# Altium PCB JTAG_USB.PcbDoc (part 1 of 2)
Units mil, origin at the board's own origin, x right, y up, seen from the top; angles counter-clockwise.
Board outline 1370 x 2285 mil, 4 copper layers (Top Layer, Int1 (GND), Int2 (PWR), Bottom Layer), stack 62.468 mil thick; 60 components, 42 nets, 234 pads, 167 vias.
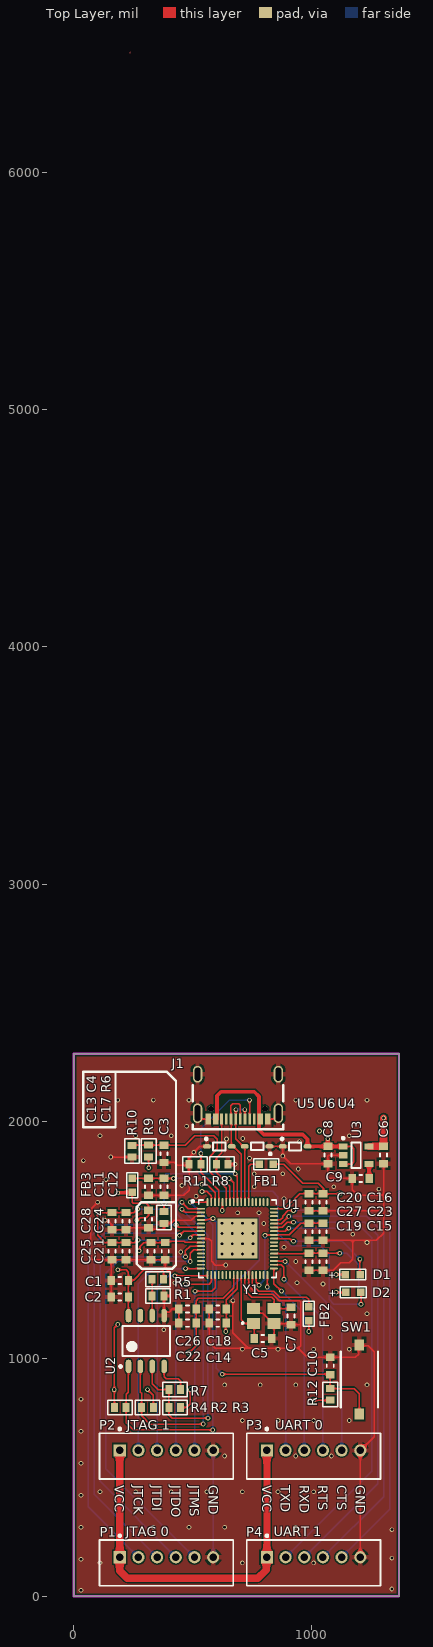
[diagram p0: Top Layer view]
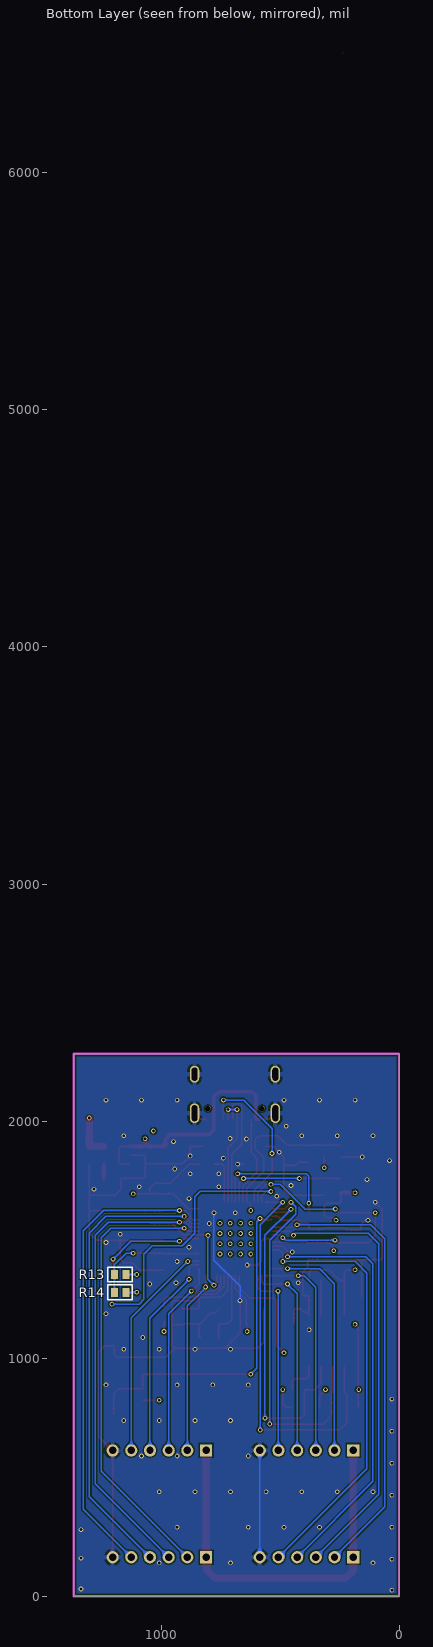
[diagram p1: Bottom Layer view, seen from below]
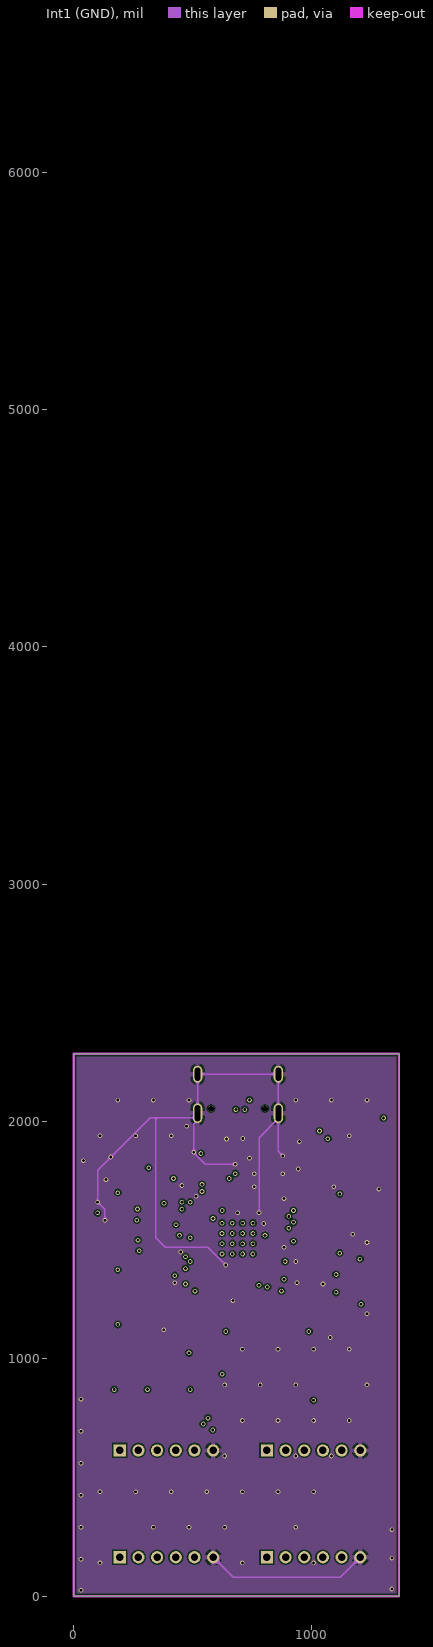
[diagram p2: Int1 (GND)]
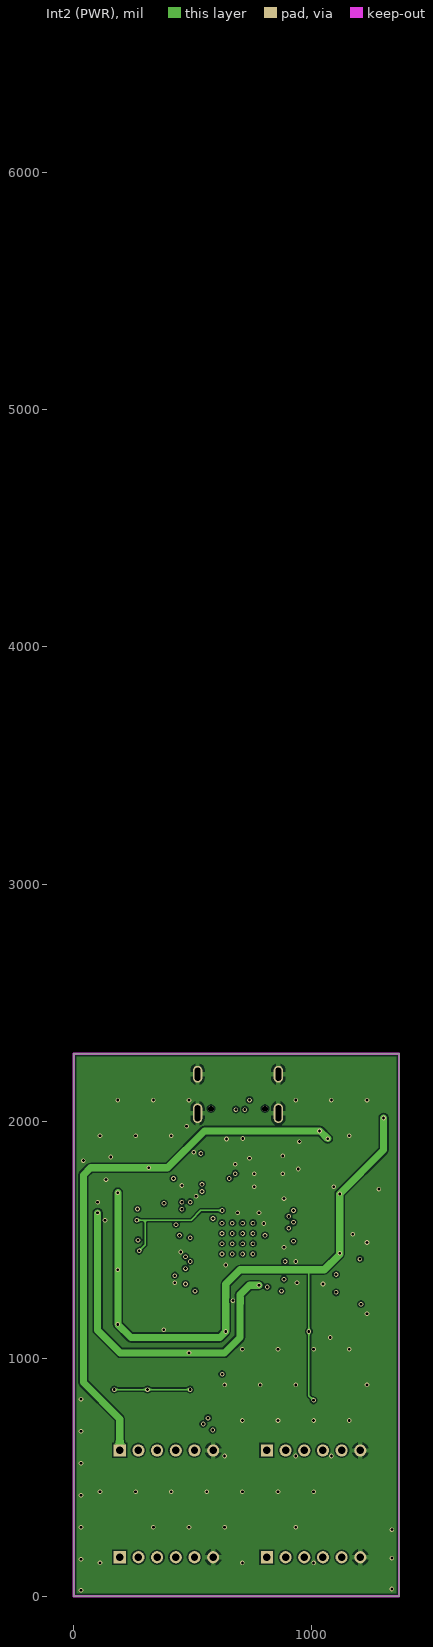
[diagram p3: Int2 (PWR)]
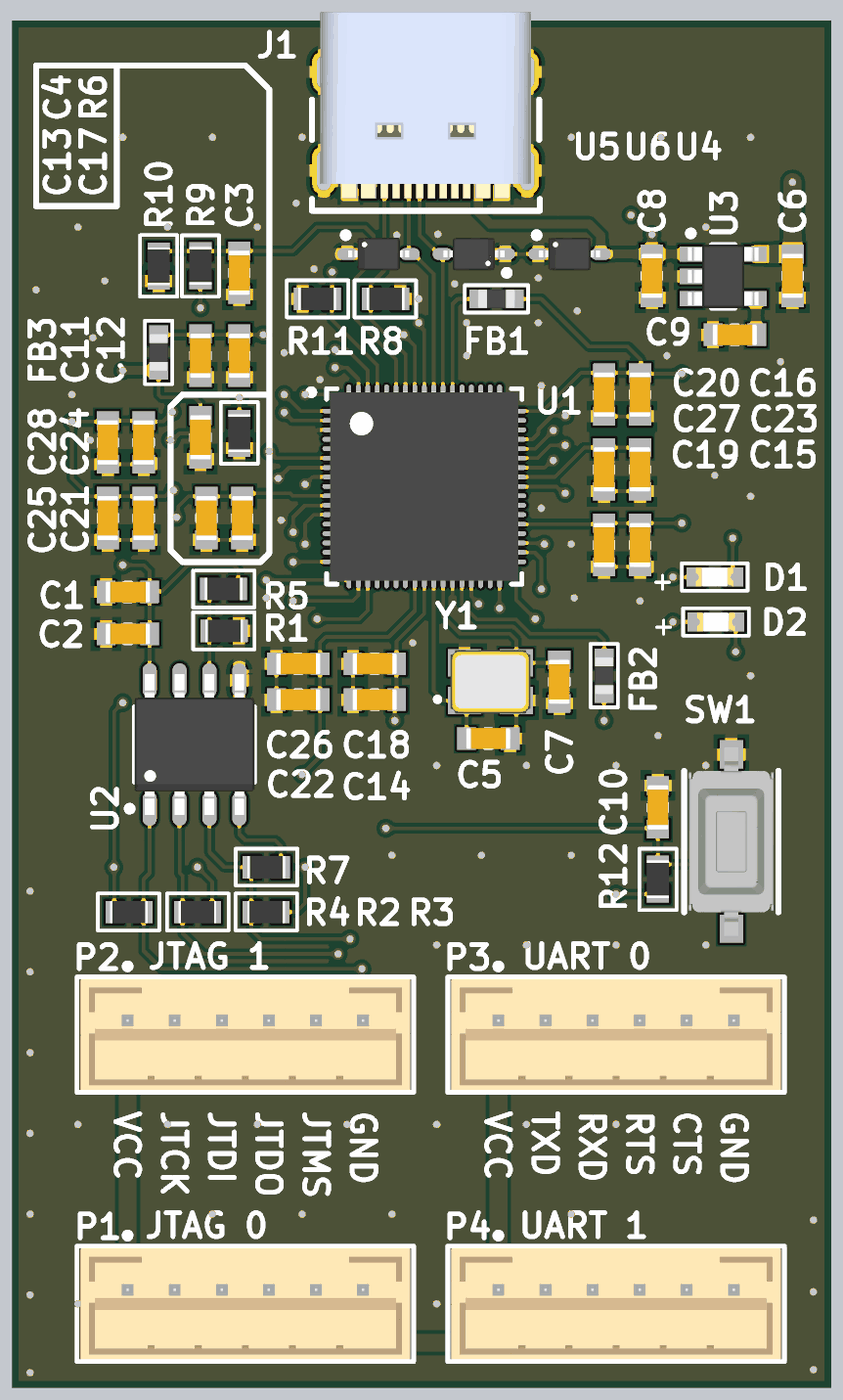
[diagram p4: 3D render of the assembled board from above, using the file's embedded part models]

## Layer stack, top to bottom
Top Solder: solder mask 1, SM-001, Dk 4
Top Layer: signal copper 1.38
Dielectric 1: prepreg 8.2, PP-022, Dk 4.5
Int1 (GND): signal copper 0.689
Dielectric 3: core 41.93, Core-042, Dk 4.6
Int2 (PWR): signal copper 0.689
Dielectric 5: prepreg 8.2, PP-022, Dk 4.5
Bottom Layer: signal copper 1.38
Bottom Solder: solder mask 1, SM-001, Dk 4

## Board outline
0,0 0,2285 1370,2285 1370,0

## Design rules (kind name [scope] priority, off if disabled: settings)
Clearance [All] p1: gap=6 ignorepadtopadclearanceinfootprint=TRUE
ComponentClearance [All] p1: gap=3.94 collisioncheckmode=3 verticalgap=3.94 showdistances=FALSE
DiffPairsRouting DIFF_ETH_MCU [InNetClass('ETH_MCU')] p1: maxlimit=6 minlimit=5 mostfreqgap=6 toplayer_mingap=6 toplayer_minwidth=6.6 toplayer_maxwidth=6.6 toplayer_prefwidth=6.6 bottomlayer_mingap=6 bottomlayer_minwidth=6.6 bottomlayer_maxwidth=6.6 bottomlayer_prefwidth=6.6 impedanceprofiledriven=TRUE impedanceprofileid={6C302A0D-4EA0-405E-9BCA-127200D1E14D} impedanceprofilevalue=100.000000 maxuncoupledlength=500
DiffPairsRouting DIFF_ETH [InNetClass('ETH')] p2: maxlimit=6 minlimit=5 mostfreqgap=6 toplayer_mingap=6 toplayer_minwidth=6.6 toplayer_maxwidth=6.6 toplayer_prefwidth=6.6 bottomlayer_mingap=6 bottomlayer_minwidth=6.6 bottomlayer_maxwidth=6.6 bottomlayer_prefwidth=6.6 impedanceprofiledriven=TRUE impedanceprofileid={6C302A0D-4EA0-405E-9BCA-127200D1E14D} impedanceprofilevalue=100.000000 maxuncoupledlength=500
HoleSize [All] p1: absolutevalues=TRUE maxlimit=196.85 minlimit=0.98 maxpercent=80.000 minpercent=20.000
MatchedLengths SRAM_RAM_DATA [InNetClass('RAM_DATA')] p1: tolerance=1000 checknetsindiffpair=FALSE checkdiffpairvsdiffpair=TRUE checkxsignals=TRUE checkothers=TRUE usedelayunits=TRUE delaytolerance=800.000000 targetsourcename="Not defined"
MatchedLengths SRAM_RAM_ADDRESS [InNetClass('RAM_ADDRESS')] p2: tolerance=1000 checknetsindiffpair=FALSE checkdiffpairvsdiffpair=TRUE checkxsignals=TRUE checkothers=TRUE usedelayunits=TRUE delaytolerance=800.000000 targetsourcename="Not defined"
MinimumSolderMaskSliver [All] p1: minsoldermaskwidth=0
PolygonConnect [All] p1: thpad.connectstyle=Relief thpad.reliefconductorwidth=20 thpad.reliefentries=4 thpad.polygonreliefangle="90 Angle" thpad.airgapwidth=10 smdpad.connectstyle=Relief smdpad.reliefconductorwidth=20 smdpad.reliefentries=4 smdpad.polygonreliefangle="90 Angle" smdpad.airgapwidth=10 via.connectstyle=Direct via.reliefconductorwidth=10 via.reliefentries=4 via.polygonreliefangle="90 Angle" via.airgapwidth=10
RoutingVias [All] p1: holewidth=11.81 width=19.68 viastyle="Through Hole" minholewidth=11.81 minwidth=15.75 maxholewidth=15.75 maxwidth=31.5
SilkToSilkClearance [All] p1: silktosilkclearance=0
SilkToSolderMaskClearance [IsPad] p1: minsilkscreentomaskgap=0 clearancetoexposedcopper=TRUE
SolderMaskExpansion SolderMaskExpansion_Via [IsVia] p1: expansion=4 istentingtop=TRUE
SolderMaskExpansion [All] p2: expansion=4 istentingtop=FALSE
Width Width_SRAM_DATA [InNetClass('RAM_DATA')] p1: maxlimit=6 minlimit=4.25 preferedwidth=6 toplayer_minwidth=6 midlayer1_maxwidth=4.25 midlayer1_prefwidth=4.25 midlayer2_maxwidth=4.25 midlayer2_prefwidth=4.25 bottomlayer_minwidth=6 impedanceprofiledriven=TRUE impedanceprofileid={6F8FAE8A-4695-4348-B094-4BD2B9309831} impedanceprofilevalue=70.550000 minimp=50.000000 maximp=50.000000 favimp=50.000000
Width Width_SRAM_ADDRESS [InNetClass('RAM_ADDRESS')] p2: maxlimit=6 minlimit=4.25 preferedwidth=6 toplayer_minwidth=6 midlayer1_maxwidth=4.25 midlayer1_prefwidth=4.25 midlayer2_maxwidth=4.25 midlayer2_prefwidth=4.25 bottomlayer_minwidth=6 impedanceprofiledriven=TRUE impedanceprofileid={6F8FAE8A-4695-4348-B094-4BD2B9309831} impedanceprofilevalue=70.550000 minimp=50.000000 maximp=50.000000 favimp=50.000000
Width Width_ETH_RMII [InNetClass('ETH_MCU')] p3: maxlimit=6.64 minlimit=4.75 preferedwidth=6.64 toplayer_minwidth=6.64 midlayer1_maxwidth=4.75 midlayer1_prefwidth=4.75 midlayer2_maxwidth=4.75 midlayer2_prefwidth=4.75 bottomlayer_minwidth=6.64 impedanceprofiledriven=TRUE impedanceprofileid={918F58F9-5A5E-40F6-9422-E0B4167C5483} impedanceprofilevalue=68.000000 minimp=50.000000 maximp=50.000000 favimp=50.000000
Width Width_WIFI_ANT [InNetClass('WIFI')] p4: maxlimit=6.64 minlimit=4.75 preferedwidth=6.64 toplayer_minwidth=6.64 midlayer1_maxwidth=4.75 midlayer1_prefwidth=4.75 midlayer2_maxwidth=4.75 midlayer2_prefwidth=4.75 bottomlayer_minwidth=6.64 impedanceprofiledriven=TRUE impedanceprofileid={918F58F9-5A5E-40F6-9422-E0B4167C5483} impedanceprofilevalue=68.000000 minimp=50.000000 maximp=50.000000 favimp=50.000000
Width [All] p5: maxlimit=30 minlimit=6 preferedwidth=15
24 further rules are at their usual default settings.

## Classes and differential pairs
component class 02_IO_Interface: J1 P1 P2 P3 P4 U4 U5 U6
component class 01_USB_Interface: C1 C2 C3 C4 C5 C6 C7 C8 C9 C10 C11 C12 C13 C14 C15 C16 C17 C18 C19 C20 C21 C22 C23 C24 C25 C26 C27 C28 D1 D2 FB1 FB2 FB3 R1 R2 R3 R4 R5 R6 R7 R8 R9 R10 R11 R12 R13 R14 SW1 U1 U2 U3 Y1
differential pair USB_D: +USB_D_P -USB_D_N

## Components (designator, comment, footprint, x,y, rotation, side; value= is the part's Value field where it differs from the comment)
C1 "1 uF, 16 VDC" CAP_0603 193.58,1330 r0 top
C2 "100 nF, 50 VDC" CAP_0603 193.58,1260 r0 top
C3 "33 nF, 50 VDC" CAP_0603 380,1863.58 r90 top
C4 "100 nF, 50 VDC" CAP_0603 315,1588.58 r90 top
C5 "10 pF, 50 VDC" CAP_0603 796.42,1085 r180 top
C6 "1 uF, 16 VDC" CAP_0603 1305,1858.58 r90 top
C7 "10 pF, 50 VDC" CAP_0603 915,1180 r90 top
C8 "1 uF, 16 VDC" CAP_0603 1070,1858.58 r90 top
C9 "10 nF, 50 VDC" CAP_0603 1208.58,1760 r0 top
C10 "100 nF, 50 VDC" CAP_0603 1080,970 r270 top
C11 "1 uF, 16 VDC" CAP_0603 315,1725 r90 top
C12 "100 nF, 50 VDC" CAP_0603 380,1725 r90 top
C13 "1 uF, 16 VDC" CAP_0603 325,1453.58 r90 top
C14 "1 uF, 16 VDC" CAP_0603 606.42,1150 r0 top
C15 "1 uF, 16 VDC" CAP_0603 1050,1408.58 r90 top
C16 "1 uF, 16 VDC" CAP_0603 1050,1660 r90 top
C17 "100 nF, 50 VDC" CAP_0603 385,1453.58 r90 top
C18 "100 nF, 50 VDC" CAP_0603 606.42,1210 r0 top
C19 "100 nF, 50 VDC" CAP_0603 990,1408.58 r90 top
C20 "100 nF, 50 VDC" CAP_0603 990,1660 r90 top
C21 "1 uF, 16 VDC" CAP_0603 220,1453.58 r90 top
C22 "1 uF, 16 VDC" CAP_0603 478.58,1150 r0 top
C23 "1 uF, 16 VDC" CAP_0603 1050,1535 r90 top
C24 "1 uF, 16 VDC" CAP_0603 220,1580 r90 top
C25 "100 nF, 50 VDC" CAP_0603 160,1453.58 r90 top
C26 "100 nF, 50 VDC" CAP_0603 478.58,1210 r0 top
C27 "100 nF, 50 VDC" CAP_0603 990,1535 r90 top
C28 "100 nF, 50 VDC" CAP_0603 160,1580 r90 top
D1 "Red, 2V" WL-SMCW_0603_H=0.7mm 1175,1355 r180 top
D2 "Red, 2V" WL-SMCW_0603_H=0.7mm 1176.94,1279.94 r180 top
FB1 "600 Ohms, 1 A" FER_0603 810,1820 r180 top
FB2 "600 Ohms, 1 A" FER_0603 990,1190 r90 top
FB3 "600 Ohms, 1 A" FER_0603 245,1730.47 r90 top
J1 "USB 2.0 Type C" USB4105-GF-A 691.42,2104.59 r180 top
P1 "2A, 125V(AC)" 62000611622 390,140 r180 top
P2 "2A, 125V(AC)" 62000611622 390,590 r180 top
P3 "2A, 125V(AC)" 62000611622 1010,590 r180 top
P4 "2A, 125V(AC)" 62000611622 1010,140 r180 top
R1 "NM" RES_0603 354.61,1265 r180 top
R2 "10 KOhm, 1/10 W" RES_0603 310,795 r0 top
R3 "10 KOhm, 1/10 W" RES_0603 424.61,795 r0 top
R4 "10 KOhm, 1/10 W" RES_0603 195.39,795 r180 top
R5 "10 KOhm, 1/10 W" RES_0603 353.61,1335 r0 top
R6 "12 KOhm, 1/4 W" RES_0603 380,1595.39 r90 top
R7 "2.2 KOhm, 1/10 W" RES_0603 425,870 r0 top
R8 "100 KOhm, 1/10 W" RES_0603 624.61,1820 r180 top
R9 "100 KOhm, 1/4 W" RES_0603 315,1875.39 r270 top
R10 "13 KOhm, 1/4 W" RES_0603 245,1874.61 r90 top
R11 "100 KOhm, 1/10 W" RES_0603 510.39,1820 r0 top
R12 "10 KOhm, 1/10 W" RES_0603 1080,850 r270 top
R13 "330 Ohm, 1/10 W" RES_0603 1175,1355 r0 bottom
R14 "330 Ohm, 1/10 W" RES_0603 1175,1280 r0 bottom
SW1 "TS-1101-C-W" TS-1101-C-W 1202.68,912.77 r90 top
U1 "FT4232HPQ" FT4232HPQ 689.25,1506.46 r0 top
U2 "AT93C56B-SSHM-T" AT93C56B 305,1075 r90 top
U3 "RT9193-33GB-3.3V, 300 mA" RT9193-xxGB 1189.13,1857.6 r0 top
U4 "AQ1205-01FTG" SOD323 932.17,1895 r0 top
U5 "AQ1205-01FTG" SOD323 612.83,1895 r0 top
U6 "AQ1205-01FTG" SOD323 772.17,1895 r180 top
Y1 "12MHz" WE-XTAL_CFPX-180 800,1180 r0 top

## Footprints (in the part's own frame and the unit in brackets; to place one, negate y for a bottom-side part, rotate by r counter-clockwise, add the part's x,y. Pads: shape width x height; smd on the part's side, far side on the other; paste and mask are expansions set on the pad)
62000611622 [mm] "2.00mm Male Vertical Shrouded Header, 6p"
  rect 1.3x1.3 hole 0.8: 1(5,-0.6)
  round 1.3 hole 0.8: 2(3,-0.6) 3(1,-0.6) 4(-1,-0.6) 5(-3,-0.6) 6(-5,-0.6)
  silkscreen extent -7.15,-3.02 7.15,2.45, body extent -7,-2.35 7,2.35, height 6.13
AT93C56B [mm] "SOIC, 8-Leads, Body 4.93x3.90mm, Pitch 1.27mm, IPC Medium Density"
  oval 1.45x0.6 smd: 1(-2.725,1.905) 2(-2.725,0.635) 3(-2.725,-0.635) 4(-2.725,-1.905) 5(2.725,-1.905) 6(2.725,-0.635) 7(2.725,0.635) 8(2.725,1.905)
  silkscreen extent -2.85,-2.55 1.6,2.88, body extent -3,-2.55 3,2.55, height 1.35
CAP_0603 [mm] "Chip Capacitor, 2-Leads, Body 1.80x0.80mm, IPC Medium Density"
  rect 0.8x0.95 smd: 1(-0.925,0) 2(0.925,0)
  silkscreen extent -0.15,-0.38 0.15,0.38, body extent -0.95,-0.45 0.95,0.45, height 0.9
FER_0603 [mm]
  rect 0.8x0.8 smd: 1(-0.75,0) 2(0.75,0)
  silkscreen extent -1.34,-0.58 1.35,0.58, body extent -0.8,-0.4 0.8,0.4, height 0.8
FT4232HPQ [mm] "QFN, 68-Leads, Body 8.00x8.00mm, Pitch 0.40mm, Thermal Pad 4.30x4.30mm, IPC Medium Density"
  oval 0.85x0.2 smd: 1(-3.9,3.2) 2(-3.9,2.8) 3(-3.9,2.4) 4(-3.9,2) 5(-3.9,1.6) 6(-3.9,1.2) 7(-3.9,0.8) 8(-3.9,0.4) 9(-3.9,0) 10(-3.9,-0.4) 11(-3.9,-0.8) 12(-3.9,-1.2) 13(-3.9,-1.6) 14(-3.9,-2) 15(-3.9,-2.4) 16(-3.9,-2.8) 17(-3.9,-3.2) 35(3.9,-3.2) 36(3.9,-2.8) 37(3.9,-2.4) 38(3.9,-2) 39(3.9,-1.6) 40(3.9,-1.2) 41(3.9,-0.8) 42(3.9,-0.4) 43(3.9,0) 44(3.9,0.4) 45(3.9,0.8) 46(3.9,1.2) 47(3.9,1.6) 48(3.9,2) 49(3.9,2.4) 50(3.9,2.8) 51(3.9,3.2)
  oval 0.2x0.85 smd: 18(-3.2,-3.9) 19(-2.8,-3.9) 20(-2.4,-3.9) 21(-2,-3.9) 22(-1.6,-3.9) 23(-1.2,-3.9) 24(-0.8,-3.9) 25(-0.4,-3.9) 26(0,-3.9) 27(0.4,-3.9) 28(0.8,-3.9) 29(1.2,-3.9) 30(1.6,-3.9) 31(2,-3.9) 32(2.4,-3.9) 33(2.8,-3.9) 34(3.2,-3.9) 52(3.2,3.9) 53(2.8,3.9) 54(2.4,3.9) 55(2,3.9) 56(1.6,3.9) 57(1.2,3.9) 58(0.8,3.9) 59(0.4,3.9) 60(0,3.9) 61(-0.4,3.9) 62(-0.8,3.9) 63(-1.2,3.9) 64(-1.6,3.9) 65(-2,3.9) 66(-2.4,3.9) 67(-2.8,3.9) 68(-3.2,3.9)
  rect 4.3x4.3 smd: 69(0,0)
  silkscreen extent -4.92,-4.15 4.15,4.15, body extent -4.01,-4.01 4.01,4.01, height 0.9
RES_0603 [mm] "Chip Resistor, 2-Leads, Body 1.55x0.85mm, IPC Medium Density"
  rect 0.75x0.95 smd: 1(-0.625,0) 2(0.625,0)
  silkscreen extent -1.3,-0.79 1.32,0.79, body extent -0.8,-0.48 0.8,0.48, height 0.5
RT9193-xxGB [mm] "SOT23, 5-Leads, Body 2.90x2.79mm, Pitch 0.95mm, IPC Medium Density"
  rect 0.95x0.65 smd: 1(-1.375,0.95) 2(-1.375,0) 3(-1.375,-0.95) 4(1.375,-0.95) 5(1.375,0.95)
  silkscreen extent -1.5,-1.35 0.5,1.95, body extent -1.5,-1.35 1.5,1.35, height 1.3
SOD323 [mm] "TSOP, 2-Leads, Body 1.30x1.70mm, Pitch 0.65mm, IPC Medium Density"
  oval 0.85x0.5 smd: 1(-1.325,0) 2(1.325,0)
  silkscreen extent -1.52,-0.43 0.66,0.92, body extent -1.31,-0.7 1.31,0.7, height 1
TS-1101-C-W [mm]
  rect 1.2x1 smd: 1(-3.7,0) 2(3.7,0)
  silkscreen extent -3,-2 3,2, body extent -4,-1.8 4,1.8, height 2.5
USB4105-GF-A [mm]
  round 0.6 hole 0.6: 5(-2.89,1.278) 6(2.89,1.278)
  rect 0.3x1.15 smd: A1(-3.35,2.403) A4(-2.55,2.403) A5(-1.25,2.403) A6(-0.25,2.403) A7(0.25,2.403) A8(1.25,2.403) A9(2.55,2.403) A12(3.35,2.403) B1(3.05,2.403) B4(2.25,2.403) B5(1.75,2.403) B6(0.75,2.403) B7(-0.75,2.403) B8(-1.75,2.403) B9(-2.25,2.403) B12(-3.05,2.403)
  oval 1x1.8 hole 0.6 slot 1.4 at 90 deg: SHELL(-4.32,-2.402) SHELL(4.32,-2.402)
  oval 1x2.1 hole 0.6 slot 1.7 at 90 deg: SHELL(-4.32,1.778) SHELL(4.32,1.778)
  silkscreen extent -4.85,-1.23 4.83,3.49, body extent -4.47,-4.95 4.47,2.95, height 3.2
WE-XTAL_CFPX-180 [mm] "Quartz Crystal, size CFPX-180, body 3.4x2.7mm"
  rect 1.4x1.15 smd: 1(-1.1,-0.8) 2(1.1,-0.8) 3(1.1,0.8) 4(-1.1,0.8)
  silkscreen extent -2.35,-0.85 -2.15,-0.65, body extent -1.7,-1.35 1.7,1.35, height 0.65
WL-SMCW_0603_H=0.7mm [mm] "SMD Mono-color Chip LED, body 1.6x0.8mm"
  rect 0.8x0.8 smd: 1(-0.8,0) 2(0.8,0)
  silkscreen extent -1.4,-0.58 1.4,0.58, body extent -0.8,-0.4 0.8,0.4, height 0.7

## Part data
C1 C6 C8 C11 C13 C14 C15 C16 C21 C22 C23 C24: library part 0106031051016, "CAP, size 0603, 1 uF, 16 VDC", Capacitance="1 uF", LCSC Part #=C1592, Manufacturer="Samsung Electro-Mechanics", Manufacturer Part Number=CL10B105KO8NNWC, Operating Temperature Max="+ 85 C", Operating Temperature Min="- 40 C", Package / Case=0603, Supplier 1 Part Number=187-CL10B105KO8NNWC, Supplier 2 Part Number=1276-CL10B105KO8NNWCTR-ND, Supplier 3 Part Number=N/A, Tolerance=+/-10%, Voltage Rating DC="16 VDC", ComponentLink1Description=Datasheet, ComponentLink1URL=https://www.mouser.vn/datasheet/2/585/Samsung_MLCC_1837944-1929650.pdf, Mount=SMD/SMT, Packaging="Tape and Reel", Supplier 1=Mouser, Supplier 1 URL=https://www.mouser.vn/ProductDetail/Samsung-Electro-Mechanics/CL10B105KO8NNWC?qs=81r%252BiQLm7BT%252BXtc72qn1ug%3D%3D&utm_source=mouser-refine-download&utm_medium=file&utm_campaign=CL10B105KO8NNWC&utm_content=Samsung-Electro-Mechanics, Supplier 2=Digi-Key, Supplier 2 URL=https://www.digikey.com/en/products/detail/samsung-electro-mechanics/cl10b105ko8nnwc/16572783, Supplier 3=thegioiic, Supplier 3 URL=https://www.thegioiic.com/tu-gom-0603-1uf-16v
C2 C4 C10 C12 C17 C18 C19 C20 C25 C26 C27 C28: library part 0106031041050, "CAP, size 0603, 100 nF, 50 VDC", Capacitance="100 nF", LCSC Part #=C14663, Manufacturer=TDK, Manufacturer Part Number=CGA3E3X8R1H104K080AE, Operating Temperature Max="+ 85 C", Operating Temperature Min="- 40 C", Package / Case=0603, Supplier 1 Part Number=810-CGA3E3X8R1H104KA, Supplier 2 Part Number=445-173697-2-ND, Supplier 3 Part Number=N/A, Tolerance=+/-10%, Voltage Rating DC="50 VDC", ComponentLink1Description=Datasheet, ComponentLink1URL=https://product.tdk.com/system/files/dam/doc/product/capacitor/ceramic/mlcc/catalog/mlcc_automotive_soft_en.pdf?ref_disty=mouser, Mount=SMD/SMT, Packaging="Tape and Reel", Supplier 1=Mouser, Supplier 1 URL=https://www.mouser.com/ProductDetail/TDK/CGA3E3X8R1H104K080AE?qs=nQSIdc08i%252Bd8g3IRRgU2bw%3D%3D&utm_source=mouser-refine-download&utm_medium=file&utm_campaign=CGA3E3X8R1H104K080AE&utm_content=TDK, Supplier 2=Digi-Key, Supplier 2 URL=https://www.digikey.com/en/products/detail/tdk-corporation/cga3e3x8r1h104k080ae/5809262, Supplier 3=thegioiic, Supplier 3 URL=N/A
C3: library part 0106033331050, "CAP, size 0603, 33 nF, 50 VDC", Capacitance="33 nF", LCSC Part #=N/A, Manufacturer=TDK, Manufacturer Part Number=CGA3E2X7R1H333K080AA, Operating Temperature Max="+ 85 C", Operating Temperature Min="- 40 C", Package / Case=0603, Supplier 1 Part Number=810-CGA3E2X7R1H333K, Supplier 2 Part Number=445-6924-2-ND, Tolerance=+/-10%, Voltage Rating DC="50 VDC", ComponentLink1Description=Datasheet, ComponentLink1URL=https://product.tdk.com/system/files/dam/doc/product/capacitor/ceramic/mlcc/catalog/mlcc_automotive_general_en.pdf?ref_disty=mouser, Mount=SMD/SMT, Packaging="Tape and Reel", Supplier 1=Mouser, Supplier 1 URL=https://www.mouser.com/ProductDetail/TDK/CGA3E2X7R1H333K080AA?qs=NRhsANhppD8XLu6u%252B%2FdPcg%3D%3D&utm_source=mouser-refine-download&utm_medium=file&utm_campaign=CGA3E2X7R1H333K080AA&utm_content=TDK, Supplier 2=Digi-Key, Supplier 2 URL=https://www.digikey.com/en/products/detail/tdk-corporation/cga3e2x7r1h333k080aa/2672817, Supplier 3=thegioiic, Supplier 3 Part Number=N/A, Supplier 3 URL=N/A
C5 C7: library part 0106031000550, "CAP, size 0603, 10 pF, 50 VDC", Capacitance="10 pF", LCSC Part #=C597129, Manufacturer=TDK, Manufacturer Part Number=CGA3E2NP01H100D080AA, Operating Temperature Max="+ 85 C", Operating Temperature Min="- 40 C", Package / Case=0603, Supplier 1 Part Number=810-CGA3E2NP01H100DA, Supplier 2 Part Number=445-12387-2-ND, Supplier 3 Part Number=N/A, Tolerance=+/-5%, Voltage Rating DC="50 VDC", ComponentLink1Description=Datasheet, ComponentLink1URL=https://product.tdk.com/system/files/dam/doc/product/capacitor/ceramic/mlcc/catalog/mlcc_automotive_hightemp_en.pdf?ref_disty=mouser, Mount=SMD/SMT, Packaging="Tape and Reel", Supplier 1=Mouser, Supplier 1 URL=https://www.mouser.com/ProductDetail/TDK/CGA3E2NP01H100D080AA?qs=xLDY6iXSiQYSDBjUp7bVxg%3D%3D&utm_source=mouser-refine-download&utm_medium=file&utm_campaign=CGA3E2NP01H100D080AA&utm_content=TDK, Supplier 2=Digi-Key, Supplier 2 URL=https://www.digikey.com/en/products/detail/tdk-corporation/cga3e2np01h100d080aa/3949623, Supplier 3=thegioiic, Supplier 3 URL=N/A
C9: library part 0106031030550, "CAP, size 0603, 10 nF, 50 VDC", Capacitance="10 nF", Manufacturer=TDK, Manufacturer Part Number=CGA3E2C0G1H103J080AE, Operating Temperature Max="+ 85 C", Operating Temperature Min="- 40 C", Package / Case=0603, Supplier 1 Part Number=810-CGA3E2C0G1H103J8, Supplier 2 Part Number=445-CGA3E2C0G1H103J080AETR-ND, Supplier 3 Part Number=N/A, Tolerance=+/-5%, Voltage Rating DC="50 VDC", ComponentLink1Description=Datasheet, ComponentLink1URL=https://product.tdk.com/system/files/dam/doc/product/capacitor/ceramic/mlcc/catalog/mlcc_automotive_soft_en.pdf?ref_disty=mouser, Mount=SMD/SMT, Packaging="Tape and Reel", Supplier 1=Mouser, Supplier 1 URL=https://www.mouser.com/ProductDetail/TDK/CGA3E2C0G1H103J080AE?qs=P1JMDcb91o6ZkMITrWTUZQ%3D%3D&utm_source=mouser-refine-download&utm_medium=file&utm_campaign=CGA3E2C0G1H103J080AE&utm_content=TDK, Supplier 2=Digi-Key, Supplier 2 URL=https://www.digikey.com/en/products/detail/tdk-corporation/cga3e2c0g1h103j080ae/11697946, Supplier 3=thegioiic, Supplier 3 URL=N/A
D1 D2: library part 160603RedBlur, "WL-SMCW SMT Mono-color Chip LED Blur, size 0603, Red, 2V, 140deg", Color=Red, LCSC Part #=C510294, Manufacturer="ROHM Semiconductor", Manufacturer Part Number=CSL1901VW1, Operating Temperature Max="+ 85 C", Operating Temperature Min="- 40 C", Package / Case=0603, Supplier 1 Part Number=755-CSL1901VW1, Supplier 2 Part Number=511-1580-2-ND, Supplier 3 Part Number=N/A, ComponentLink1Description=Datasheet, ComponentLink1URL=https://www.rohm.com/datasheet?p=CSL1901VW&dist=Mouser&media=referral&source=mouser.com&campaign=Mouser, Mount=SMD/SMT, Packaging="Tape and Reel", Supplier 1=Mouser, Supplier 1 URL=https://www.mouser.vn/ProductDetail/ROHM-Semiconductor/CSL1901VW1?qs=vvQtp7zwQdNmrXZcE27xEA%3D%3D, Supplier 2=Digi-Key, Supplier 2 URL=https://www.digikey.com/en/products/detail/rohm-semiconductor/SML-D12U8WT86/1641799, Supplier 3=thegioiic, Supplier 3 URL=N/A, Type=Blur
FB1 FB2 FB3: library part 03060360110225, "Ferrite, 0603, 600 Ohms, 1 A", Manufacturer="Wurth Elektronik", Manufacturer Part Number=742792651, Maximum DC Current="1 A", Maximum DC Resistance="200 mOhms", Operating Temperature Max=105°C, Operating Temperature Min=-55°C, Package / Case=0603, Supplier 1 Part Number=710-742792651, Supplier 2 Part Number=N/A, Test Frequency="100 MHz", Tolerance=+/-25%, ComponentLink1Description=Datasheet, ComponentLink1URL=https://www.we-online.com/catalog/datasheet/742792651.pdf, Impedance="600 Ohms", Mount=SMD/SMT, Packaging="Tape and Reel", Supplier 1=Mouser, Supplier 1 URL=https://www.mouser.com/ProductDetail/Wurth-Elektronik/742792651?qs=sGAEpiMZZMt1hubY80%2Fs8M60rIzA20dgTaAssd1%2FEf4%3D&utm_source=mouser-refine-download&utm_medium=file&utm_campaign=742792651&utm_content=Wurth-Elektronik, Supplier 2=Digi-Key, Supplier 2 URL=N/A, Supplier 3=thegioiic, Supplier 3 Part Number=N/A, Supplier 3 URL=N/A
J1: library part USB4105-GF-A, "USB Connectors USB Type C,2.0, Rec,SMT, 0.95mmTH Shell Stakes,G/F,RA,Top Mnt,T&R", Contact Resistance="30 mOhm", LCSC Part #=C2765186, Manufacturer=GCT, Operating Temperature="-40 to 105 degC", Package / Case=N/A, Rated Current="5 A", Supplier 1 Part Number=640-USB4105-GF-A, Working Voltage="48 VDC", ComponentLink1Description=Datasheet, ComponentLink1URL=https://www.mouser.vn/datasheet/2/837/Global_Connector_Technology_usb4105-3106202.pdf, Connector Type="USB 2.0 Type C", Gender=Receptacle, Manufacturer Part Number=USB4105-GF-A, Mount=SMD/SMT, Number of Contacts="16 Contact", Number of Ports="1 Port", Orientation=Horizontal, Packaging="Tape and Reel", Published Date="September 2018", Supplier 1=Mouser, Supplier 1 URL=https://www.mouser.vn/ProductDetail/GCT/USB4105-GF-A?qs=KUoIvG%2F9IlY%2FMLlBMpStpA%3D%3D, Supplier 2=Digi-Key, Supplier 2 Part Number=N/A, Supplier 2 URL=N/A, Supplier 3=thegioiic, Supplier 3 Part Number=N/A, Supplier 3 SN=N/A, Supplier 3 URL=https://www.thegioiic.com/cong-usb-cai-3-1-type-c-16-chan-thang-dan-smd
P1 P2 P3 P4: library part 62000611622, "WR-WTB Male Vertical Shrouded Header, pitch 2mm, 6p", Contact Resistance=20mOhm, LCSC Part #=N/A, Manufacturer="Wurth Elektronik", Operating Temperature Max="+ 85 C", Operating Temperature Min="- 25 C", Package / Case=6, Rated Current=2A, Supplier 1 Part Number=710-62000611622, Withstanding Voltage=800VAC, Working Voltage=125VAC, ComponentLink1Description=Datasheet, ComponentLink1URL=https://www.we-online.com/catalog/datasheet/62000611622.pdf, Gender=Male, Manufacturer Part Number=62000611622, Mount=THT, Packaging=Bag, Part Number=62000611622, Pin Number=6, Pitch=2mm, Supplier 1=Mouser, Supplier 1 URL=https://www.mouser.vn/ProductDetail/Wurth-Elektronik/62000611622?qs=ulEaXIWI0c%2F38WR3e0VejA%3D%3D, Supplier 2=Digi-Key, Supplier 2 Part Number=N/A, Supplier 2 URL=N/A, Supplier 3=thegioiic, Supplier 3 Part Number=N/A, Supplier 3 URL=https://www.thegioiic.com/dau-ph-2-0mm-6-chan-thang-xuyen-lo, Type=Vertical
R1: library part 000603_NM, "RES, size 0603, NM, N/A", LCSC Part #=N/A, Operating Temperature Max="+ 85 C", Operating Temperature Min="- 40 C", Package / Case=0603, ComponentLink1Description=Datasheet, ComponentLink1URL=N/A, Manufacturer=N/A, Manufacturer Part Number=N/A, Mount=SMD/SMT, Packaging="Tape and Reel", Rated Power=N/A, Resistance=NM, Supplier 1=Mouser, Supplier 1 Part Number=N/A, Supplier 1 URL=N/A, Supplier 2=Digi-Key, Supplier 2 Part Number=N/A, Supplier 2 URL=N/A, Supplier 3=thegioiic, Supplier 3 Part Number=N/A, Supplier 3 URL=N/A, Tolerance=N/A
R2 R3 R4 R5 R12: library part 0006031031, "RES, size 0603, 10 KOhm, 1/10 W, 1%", LCSC Part #=C98220, Manufacturer=YAGEO, Manufacturer Part Number=RC0603FR-0710KL, Operating Temperature Max="+ 85 C", Operating Temperature Min="- 40 C", Package / Case=0603, Rated Power="1/10 W", Resistance="10 KOhm", Supplier 1 Part Number=N/A, Supplier 2 Part Number=311-10.0KHRTR-ND, Tolerance=+/-1%, ComponentLink1Description=Datasheet, ComponentLink1URL=https://fscdn.rohm.com/en/products/databook/datasheet/passive/resistor/chip_resistor/esr-e.pdf, Mount=SMD/SMT, Packaging="Tape and Reel", Supplier 1=Mouser, Supplier 1 URL=N/A, Supplier 2=Digi-Key, Supplier 2 URL=https://www.digikey.com/en/products/detail/yageo/rc0603fr-0710kl/726880, Supplier 3=thegioiic, Supplier 3 Part Number=N/A, Supplier 3 URL=N/A
R6: library part 0006031231, "RES, size 0603, 12 KOhm, 1/4 W", LCSC Part #=N/A, Manufacturer=OEM, Operating Temperature Max="+ 85 C", Operating Temperature Min="- 40 C", Package / Case=0603, Rated Power="1/4 W", Resistance="12 KOhm", Supplier 1 Part Number=71-RCS060312K0FKEA, Supplier 2 Part Number="541-10428-2-ND 541-10428-1-ND 541-10428-6-ND", Tolerance=+/-1%, ComponentLink1Description=Datasheet, ComponentLink1URL=https://www.vishay.com/doc?20065, Manufacturer Part Number=OEM, Mount=SMD/SMT, Packaging="Tape and Reel", Supplier 1=Mouser, Supplier 1 URL=https://www.mouser.vn/ProductDetail/Vishay-Dale/RCS060312K0FKEA?qs=sGAEpiMZZMvdGkrng054t9clqp6gtJJdYU2CGrvXFnAdCOf%2F3daJvA%3D%3D, Supplier 2=Digi-Key, Supplier 2 URL=https://www.digikey.com/en/products/detail/vishay-dale/RCS060312K0FKEA/5868600, Supplier 3=thegioiic, Supplier 3 Part Number=N/A, Supplier 3 URL=N/A
R7: library part 0006032221, "RES, size 0603, 2.2  KOhm, 1/10 W, 1%", LCSC Part #=N/A, Manufacturer=OEM, Operating Temperature Max="+ 85 C", Operating Temperature Min="- 40 C", Package / Case=0603, Rated Power="1/10 W", Resistance="2.2  KOhm", Supplier 1 Part Number=603-SR0603FR-7T2K2L, Supplier 2 Part Number=13-RC0603FR-132K2LTR-ND, Tolerance=+/-1%, ComponentLink1Description=Datasheet, ComponentLink1URL=N/A, Manufacturer Part Number=OEM, Mount=SMD/SMT, Packaging="Tape and Reel", Supplier 1=Mouser, Supplier 1 URL=https://www.mouser.vn/ProductDetail/YAGEO/SR0603FR-7T2K2L?qs=pfd5qewlna6SQQIuviAJZA%3D%3D, Supplier 2=Digi-Key, Supplier 2 URL=https://www.digikey.com/en/products/detail/yageo/RC0603FR-132K2L/13694214, Supplier 3=thegioiic, Supplier 3 Part Number=N/A, Supplier 3 URL=N/A
R8 R11: library part 0006031041, "RES, size 0603, 100 KOhm, 1/10 W, 1%", LCSC Part #=N/A, Manufacturer=OEM, Operating Temperature Max="+ 85 C", Operating Temperature Min="- 40 C", Package / Case=0603, Rated Power="1/10 W", Resistance="100 KOhm", Supplier 1 Part Number=603-SR0603FR-7T100KL, Supplier 2 Part Number="YAG5821TR-ND YAG5821CT-ND YAG5821DKR-ND", Tolerance=+/-1%, ComponentLink1Description=Datasheet, ComponentLink1URL=https://www.yageo.com/upload/media/product/productsearch/datasheet/rchip/PYu-SR_20105_RoHS_L_10.pdf, Manufacturer Part Number=OEM, Mount=SMD/SMT, Packaging="Tape and Reel", Supplier 1=Mouser, Supplier 1 URL=https://www.mouser.vn/ProductDetail/YAGEO/SR0603FR-7T100KL?qs=sGAEpiMZZMvdGkrng054tz1y1XEHv7sNa%252BA%2F4WiDMf7aGw4zRBb%2FFQ%3D%3D, Supplier 2=Digi-Key, Supplier 2 URL=https://www.digikey.com/en/products/detail/yageo/SR0603FR-7T100KL/9373095, Supplier 3=thegioiic, Supplier 3 Part Number=N/A, Supplier 3 URL=N/A
R9: library part 0006031041, "RES, size 0603, 100 KOhm, 1/4 W", LCSC Part #=N/A, Manufacturer=OEM, Operating Temperature Max="+ 85 C", Operating Temperature Min="- 40 C", Package / Case=0603, Rated Power="1/4 W", Resistance="100 KOhm", Supplier 1 Part Number=603-SR0603FR-7T100KL, Supplier 2 Part Number="YAG5821TR-ND YAG5821CT-ND YAG5821DKR-ND", Tolerance=+/-1%, ComponentLink1Description=Datasheet, ComponentLink1URL=https://www.yageo.com/upload/media/product/productsearch/datasheet/rchip/PYu-SR_20105_RoHS_L_10.pdf, Manufacturer Part Number=OEM, Mount=SMD/SMT, Packaging="Tape and Reel", Supplier 1=Mouser, Supplier 1 URL=https://www.mouser.vn/ProductDetail/YAGEO/SR0603FR-7T100KL?qs=sGAEpiMZZMvdGkrng054tz1y1XEHv7sNa%252BA%2F4WiDMf7aGw4zRBb%2FFQ%3D%3D, Supplier 2=Digi-Key, Supplier 2 URL=https://www.digikey.com/en/products/detail/yageo/SR0603FR-7T100KL/9373095, Supplier 3=thegioiic, Supplier 3 Part Number=N/A, Supplier 3 URL=N/A
R10: library part 0006031331, "RES, size 0603, 13 KOhm, 1/4 W", LCSC Part #=N/A, Manufacturer=OEM, Operating Temperature Max="+ 85 C", Operating Temperature Min="- 40 C", Package / Case=0603, Rated Power="1/4 W", Resistance="13 KOhm", Supplier 1 Part Number=755-ESR03EZPF1302, Supplier 2 Part Number=ESR03EZPF1302-ND, Tolerance=+/-1%, ComponentLink1Description=Datasheet, ComponentLink1URL=https://fscdn.rohm.com/en/products/databook/datasheet/passive/resistor/chip_resistor/esr-e.pdf, Manufacturer Part Number=OEM, Mount=SMD/SMT, Packaging="Tape and Reel", Supplier 1=Mouser, Supplier 1 URL=https://www.mouser.vn/ProductDetail/ROHM-Semiconductor/ESR03EZPF1302?qs=sGAEpiMZZMvdGkrng054tywGjayRHxH2BixSkNTZUClpiy4%252BI%252BxkXA%3D%3D, Supplier 2=Digi-Key, Supplier 2 URL=https://www.digikey.com/en/products/detail/rohm-semiconductor/ESR03EZPF1302/4007159, Supplier 3=thegioiic, Supplier 3 Part Number=N/A, Supplier 3 URL=N/A
R13 R14: library part 0006033311, "RES, size 0603, 330 Ohm, 1/10 W", LCSC Part #=C105881, Manufacturer=OEM, Operating Temperature Max="+ 85 C", Operating Temperature Min="- 40 C", Package / Case=0603, Rated Power="1/10 W", Resistance="330 Ohm", Supplier 1 Part Number=667-ERJ-UP3F3300V, Supplier 2 Part Number="10-ERJ-UP3F3300VTR-ND 10-ERJ-UP3F3300VCT-ND 10-ERJ-UP3F3300VDKR-ND", Supplier 3 Part Number=N/A, Tolerance=+/-1%, ComponentLink1Description=Datasheet, ComponentLink1URL=https://api.pim.na.industrial.panasonic.com/file_stream/main/fileversion/4484, Manufacturer Part Number=OEM, Mount=SMD/SMT, Packaging="Tape and Reel", Supplier 1=Mouser, Supplier 1 URL=https://www.mouser.vn/ProductDetail/Panasonic/ERJ-UP3F3300V?qs=sGAEpiMZZMvdGkrng054twq3eZrCFN89MDZusw5Tf7mZnfRSpxxqIA%3D%3D, Supplier 2=Digi-Key, Supplier 2 URL=https://www.digikey.com/en/products/detail/panasonic-electronic-components/ERJ-UP3F3300V/12093106, Supplier 3=thegioiic, Supplier 3 URL=N/A
SW1: "Tact Switch, L6 x W3.8 x H2.5mm, 260g, SPST-NO, 12V, 50mA", LCSC Part #="XKB Connectivity", Manufacturer="Wurth Elektronik", Operating Temperature Max=85°C, Operating Temperature Min=-40°C, Package / Case=0805, Rated Current=50mA, Rated Voltage=12VDC, Supplier 1 Part Number=N/A, Supplier 3 Part Number=OEM, Category="Tact Switches", Circuit=SPST-NO, ComponentLink1Description=Datasheet, ComponentLink1URL=https://www.we-online.com/redexpert/spec/434111025826?ad, Contact Material="Stainless Steel", Height=2.5mm, Length=6mm, Manufacturer Part Number=TS-1101-C-W, Match Code=WS-TASV, Mount="Surface Mount", Operation Force=260g, Packaging="Tape and Reel", Supplier 1=Mouser, Supplier 1 URL=N/A, Supplier 2=Digi-Key, Supplier 2 Part Number=N/A, Supplier 2 URL=N/A, Supplier 3=thegioiic, Supplier 3 URL=https://www.thegioiic.com/nut-nhan-3-5x6mm-cao-2-5mm-2-chan-smd-dau-do, Terminal Material="Copper Alloy", Terminal Plating=Silver, Washable=No, Width=3.6mm
U1: "USB Interface IC USB Bridge Type-C 3.0 32-Bit 8kB 48kB", LCSC Part #=N/A, Manufacturer=FTDI, Operating Temperature Max="+ 85 C", Operating Temperature Min="- 40 C", Package / Case=QFN-68, Supplier 1 Part Number=895-FT4232HPQ-TRAY, Supplier 2 Part Number=768-FT4232HPQ-TRAY-ND, Supply Voltage - Max="1.08 V", Supply Voltage - Min="1.32 V", Active=Active, ComponentLink1Description=Datasheet, ComponentLink1URL=https://www.mouser.com/datasheet/2/163/DS_FT4233HP-3135614.pdf, Data rate="12 Mb/s", Manufacturer Part Number=FT4232HPQ, Mount=SMD/SMT, Numbers of Ports="2 Port", Packaging="Tape and Reel", Pad count=68, Speed="High Speed (HS)", Standard="USB-C 3.0", Supplier 1=Mouser, Supplier 1 URL=https://www.mouser.com/ProductDetail/FTDI/FT4232HPQ-TRAY?qs=DRkmTr78QATL4FSPfVZC7Q%3D%3D, Supplier 2=Digi-Key, Supplier 2 URL=https://www.digikey.com/en/products/detail/ftdi-future-technology-devices-international-ltd/ft4232hpq-tray/13981003, Supplier 3=thegioiic, Supplier 3 Part Number=N/A, Supplier 3 URL=N/A
U2: "EEPROM 2K (256x8/128x16) 3-WIRE, NiPdAu, 1.7V", LCSC Part #=C111441, Manufacturer=Microchip, Maximum Clock Frequency="2 MHz", Operating Temperature Max="+ 85 C", Operating Temperature Min="- 40 C", Package / Case="SOIC-8 Narrow", Supplier 1 Part Number=556-AT93C56B-SSHM-T, Supplier 2 Part Number=N/A, Supplier 3 Part Number=AT93C56-10SI, Supply Voltage - Max="5.5 V", Supply Voltage - Min="1.7 V", ComponentLink1Description=Datasheet, ComponentLink1URL=https://www.mouser.com/datasheet/2/268/Atmel_8735_SEEPROM_AT93C56B_66B_Datasheet-1368838.pdf, Interface Type="3-Wire, Microwire", Manufacturer Part Number=AT93C56B-SSHM-T, Memory Size="2 kbit", Mount=SMD/SMT, Packaging="Tape and Reel", Supplier 1=Mouser, Supplier 1 URL=https://www.mouser.com/ProductDetail/Microchip-Technology/AT93C56B-SSHM-T?qs=SxVMCiT8IVF4cB2r9UHj%252Bg%3D%3D, Supplier 2=Digi-Key, Supplier 2 URL=N/A, Supplier 3=thegioiic, Supplier 3 URL=https://www.thegioiic.com/at93c56-10si-ic-eeprom-2kbit-8-soic
U3: library part RT9193-33GB, "LDO Voltage Regulators 300mA, Ultra-Low Noise, Ultra-Fast CMOS LDO Regulator, SOT-23-5,  3.3 V", Current Output="300 mA", LCSC Part #=C15651, Manufacturer=Richtek, Operating Temperature Max="+ 85 C", Operating Temperature Min="- 40 C", Package / Case=SOT-23-5, Rated Current="90 uA", Supplier 1 Part Number=835-RT9193-33GB, Supplier 2 Part Number=1028-1014-6-ND, Supplier 3 Part Number=N/A, Voltage Drop="220 mV", Voltage Input Maximum=5.5V, Voltage Input Minimum=2.5V, Voltage Output=3.3V, ComponentLink1Description=Datasheet, ComponentLink1URL=https://www.mouser.vn/datasheet/2/1458/DS9193_18-3104722.pdf, Manufacturer Part Number=RT9193-33GB, Mount=SMD/SMT, Packaging="Tape and Reel", Product="LDO Voltage Regulators", PSRR="- 70 dB", Supplier 1=Mouser, Supplier 1 URL=https://www.mouser.vn/ProductDetail/Richtek/RT9193-33GB?qs=amGC7iS6iy8ybRcZ9Wn2ww%3D%3D, Supplier 2=Digi-Key, Supplier 2 URL=https://www.digikey.com/en/products/detail/richtek-usa-inc/RT9193-33GB/2470048?s=N4IgTCBcDaIEoBUCcBGJBmAtO9BxAQiALoC%2BQA, Supplier 3=thegioiic, Supplier 3 URL=N/A
U4 U5 U6: "ESD Suppressors / TVS Diodes 5V 7A 30kV SOD323 Bi-dir TVS", Breakdown Voltage=5.1V, Clamping Voltage=10V, Diode Capacitance=7pF, LCSC Part #=N/A, Manufacturer=Littelfuse, Operating Temperature="-40 - 150", Operating Temperature Max="+ 85 C", Operating Temperature Min="- 40 C", Peak Pulse Current=7A, Supplier 1 Part Number=576-AQ1205-01FTG, Supplier 2 Part Number=18-AQ1205-01FTGTR-ND, Voltage ESD Air Gap=30kV, Working Voltage=5V, ComponentLink1Description=Datasheet, ComponentLink1URL=https://www.mouser.vn/datasheet/2/240/media-3320499.pdf, Manufacturer Part Number=AQ1205-01FTG, Mount=SMD/SMT, Number of Channels=1, Packaging="Tape and Reel", Peak Pulse Power Dissipation=N/A, Supplier 1=Mouser, Supplier 1 URL=https://www.mouser.vn/ProductDetail/Littelfuse/AQ1205-01FTG?qs=tlsG%2FOw5FFgT817I6cPGrg%3D%3D, Supplier 2=Digi-Key, Supplier 2 URL=https://www.digikey.com/en/products/detail/littelfuse-inc/aq1205-01ftg/17128325, Supplier 3=thegioiic, Supplier 3 Part Number=N/A, Supplier 3 URL=N/A, Voltage ESD Contact=30kV
Y1: library part 073525126010, "WE-XTAL Quartz Crystal, SMT, CFPX-180, 12MHz, +/-30ppm", Frequency Stability=+/-25ppm, Frequency Tolerance=+/-15ppm, LCSC Part #=N/A, Load Capacitance=8pF, Manufacturer=NDK, Manufacturer Part Number=NX3225SA-12MHZ-STD-CSR-6, Operating Temperature Max="+ 70 C", Operating Temperature Min="+ 20 C", Package / Case=CFPX-104/5032, Supplier 1 Part Number=344-NX3225SA12MCSR6, Supplier 2 Part Number=644-1180-2-ND, ComponentLink1Description=Datasheet, ComponentLink1URL=https://www.mouser.com/datasheet/2/905/c_NX3225SA_e-1317523.pdf, Frequency=12MHz, Mounting Technology=SMT, Packaging="Tape and Reel", Supplier 1=Mouser, Supplier 1 URL=https://www.mouser.com/ProductDetail/NDK/NX3225SA-12MHZ-STD-CSR-6?qs=55YtniHzbhCh3aOy4zgUJQ%3D%3D, Supplier 2=Digi-Key, Supplier 2 URL=https://www.digikey.com/en/products/detail/ndk-america-inc/NX3225SA-12MHZ-STD-CSR-6/3125639, Supplier 3=thegioiic, Supplier 3 Part Number=N/A, Supplier 3 URL=https://www.thegioiic.com/thach-anh-12mhz-5032-4-chan-smd

## Via types
v1: diameter 19.68, hole 11.81, Top Layer to Bottom Layer, tented both sides, 167 vias

## Nets (pads, with @x,y where several pads share a name; then routed paths per layer and width w, separated by ;. In a path a pad name is that pad's centre, name@x,y a point inside that pad or via, vN(x,y) a via of type N, cw(c..) or ccw(c..) an arc to the next point about the centre after c; other vN are vias at no path point)
1V2_USB: C21.2 C22.2 C23.2 C24.2 C25.2 C26.2 C27.2 C28.2 U1.8 U1.25 U1.31 U1.44 U1.66 | length 3597.3
  Top Layer w6: v1(268.15,1630.84) 252.31,1615 221.42,1615 C24.2 C28.2 158.58,1615 v1(100,1615) 100,1520 130,1490 C25.2 C21.2 256.3,1490 266.3,1500 v1(270,1500) ; v1(485,1025) 515,1055 C22.2 C26.2 515,1245 525,1255 630,1255 673.5,1298.5 U1.25 ; v1(490,1510) 502.2,1522.2 U1.8 ; v1(540,1735) 560,1735 594.76,1700.24 U1.66 ; U1.31 767.99,1322.65 780,1310.64 v1(780,1310) ; v1(805,1520) 806.85,1521.85 842.44,1521.85 U1.44 907.2,1522.2 956.42,1571.42 C27.2 C23.2
  Int2 (PWR) w30: v1(100,1615) 100,1120 195,1025 v1(485,1025) 635,1025 700,1090 700,1231.38 700.84,1232.22 700.84,1257.78 700,1258.62 700,1270 740,1310 v1(780,1310)
  Bottom Layer w6: v1(268.15,1630.84) 395.84,1630.84 500,1735 v1(540,1735) ; v1(270,1500) 476.3,1500 486.3,1510 v1(490,1510) ; v1(780,1310) 805,1335 v1(805,1520)
3V3_INTERNAL_USB: C1.2 C2.2 C4.2 C6.2 C13.2 C14.2 C15.2 C16.2 C17.2 C18.2 C19.2 C20.2 FB1.1 FB2.1 FB3.1 R2.2 R3.2 R4.2 R5.2 R12.2 R13.2 R14.2 U1.10 U1.26 U1.39 U1.51 U1.64 U2.8 U3.5 | length 7034.3
  Top Layer w6: R4.2 170.79,1130.79 v1(185,1145) ; v1(185,1375) 220,1375 230,1365 C1.2 ; U2.8 C2.2 C1.2 ; FB3.1 245,1660 250,1655 305,1655 315,1645 C4.2 315,1605 305,1595 279.86,1595 268.7,1583.84 v1(265,1583.84) ; v1(275,1455) 277.62,1457.62 277.62,1472.62 295,1490 C13.2 C17.2 390,1495 465,1495 469.29,1490.71 U1.10 ; v1(310,870) 334.61,845.39 R2.2 ; R5.2 378.21,1366.79 370,1375 295,1375 251.23,1331.23 231.23,1331.23 C1.2 ; R3.2 475,795 490,810 v1(490,870) ; v1(625,1625) 625.9,1625.9 625.9,1659.64 U1.64 ; v1(640,1115) 640,1147.17 C14.2 C18.2 642.83,1247.83 689.25,1294.25 U1.26 ; FB1.1 885,1820 965,1740 1030,1740 1051.42,1718.58 1051.42,1695 v1(1120,1695) ; U1.39 988.46,1443.46 C19.2 C15.2 v1(1120,1445) ; U1.51 887.44,1632.44 951.42,1696.42 C20.2 C16.2 ; v1(990,1115) FB2.1 ; v1(1010,825) 1079.61,825 R12.2
  Top Layer w15: v1(185,1700) 185.47,1700.47 244.53,1700.47 FB3.1
  Top Layer w30: U3.5 C6.2 v1(1305,2015)
  Int2 (PWR) w6: v1(170,870) v1(310,870) v1(490,870) ; v1(265,1583.84) 300,1583.84 ; v1(275,1455) 300,1480 300,1583.84 ; v1(625,1625) 535,1625 493.84,1583.84 300,1583.84 ; 995,1375 990,1370 v1(990,1115) 990,845 v1(1010,825)
  Int2 (PWR) w30: v1(185,1700) v1(185,1375) v1(185,1145) 240,1090 615,1090 v1(640,1115) 640,1231.38 639.16,1232.22 639.16,1257.78 640,1258.62 640,1315 700,1375 995,1375 1055,1375 1120,1440 v1(1120,1445) v1(1120,1695) 1305,1880 v1(1305,2015)
  Bottom Layer w6: v1(1120,1445) 1150,1445 1199.61,1395.39 R13.2 R14.2
EP_CLK: R2.1 U1.1 U2.2 | length 1565.3
  Top Layer w6: U2.2 280,860 285,855 285,795 285,760 320,725 v1(545,725) ; v1(455,1660) 482.56,1632.44 U1.1
  Bottom Layer w6: v1(455,1660) 435,1640 435,1610 545,1500 v1(545,725)
EP_CS: R4.1 U1.68 U2.1 | length 1691.9
  Top Layer w6: U2.1 230,860 220,850 R4.1 220,730 250,700 v1(585,700) ; v1(490,1660) U1.68
  Bottom Layer w6: v1(490,1660) 585,1565 v1(585,700)
EP_DATA: R3.1 R7.1 U1.2 U2.3 | length 1441.6
  Top Layer w6: U2.3 330,895 355,870 R7.1 400,869.61 R3.1 400,765 415,750 v1(565,750) ; v1(455,1630) 468.31,1616.69 U1.2
  Bottom Layer w6: v1(455,1630) 565,1520 v1(565,750)
GND: C1.1 C2.1 C3.1 C4.1 C5.1 C6.1 C7.1 C8.1 C9.1 C10.1 C11.1 C12.1 C13.1 C14.1 C15.1 C16.1 C17.1 C18.1 C19.1 C20.1 C21.1 C22.1 C23.1 C24.1 C25.1 C26.1 C27.1 C28.1 J1.A1 J1.A12 J1.B1 J1.B12 J1.SHELL P1.6 P2.6 P3.6 P4.6 R1.1 R6.1 R8.1 R10.1 R11.1 SW1.2 U1.3 U1.9 U1.29 U2.5 U3.2 U4.1 U5.1 U6.1 Y1.2 Y1.4 | length 12144.2
  Top Layer w6: v1(100,1660) 70,1630 70,1425 77.83,1417.17 C25.1 ; v1(130.84,1583.84) 133.46,1581.22 143.67,1581.22 160,1564.89 C28.1 C24.1 228.58,1552.17 C4.1 322.17,1545 375,1545 380,1550 R6.1 409.14,1570.79 422.2,1583.84 493.84,1583.84 510.94,1600.94 U1.3 ; v1(155,1850) R10.1 ; C2.1 C1.1 157.17,1414.33 C25.1 ; C11.1 C12.1 463.58,1688.58 485.79,1710.79 R11.1 ; U2.5 U2.5@380,1188.92 ; C3.1 422.83,1827.17 435,1815 480.79,1815 R11.1 ; C22.1 C26.1 413.75,1210 400.81,1197.06 388.14,1197.06 U2.5@380,1188.92 ; J1.SHELL@521.34,2034.61 521.34,2025.41 536.75,2010 J1.A12 J1.B1 ; U1.9 568.54,1506.46 580,1495 580,1410 595,1395 v1(640,1395) ; U5.1 530,1895 v1(505,1870) 485,1850 485,1820.79 R11.1 ; C18.1 C14.1 570,1070 595,1045 735,1045 ; R8.1 v1(680,1820) ; v1(670,1245) 670,1110 735,1045 ; U1.29 736.5,1308.5 773,1272 838,1272 865,1245 950,1245 955,1240 955,1147.5 ; Y1.4 776.33,1191.86 795.03,1191.86 838.39,1148.5 Y1.2 ; J1.B12 J1.A1 846.08,2010 861.5,2025.41 J1.SHELL@861.5,2034.61 ; U6.1 U4.1 v1(880,1855) 912.83,1822.17 C8.1 ; C5.1 843.31,1095.47 Y1.2 ; C19.1 C15.1 1092.17,1372.17 1125,1405 1160,1405 1175,1420 1175,1498.58 ; C27.1 C23.1 1175,1498.58 ; C20.1 1303.58,1623.58 1305,1625 ; U3.2 1073.51,1857.6 1070,1854.08 C8.1 ; P4.6 P3.6 1265,671.77 1265,1030 1240,1055 1206.12,1055 SW1.2 1200,1055.76 1200,1020 1186.42,1006.42 C10.1 983.58,1006.42 945,1045 ; C6.1 1305,1690 ; C25.1 C21.1 C13.1 C17.1 385,1384.71 405,1364.71 405,1270 400,1265 R1.1 380,1264.21 U2.5@380,1188.92 ; 735,1045 945,1045 ; Y1.2 910.08,1148.5 C7.1 951.08,1143.58 955,1147.5 ; 945,1045 955,1055 955,1147.5 ; C8.1 1070,1765 1075,1760 C9.1 1172.17,1712.83 1195,1690 1305,1690 ; 1175,1498.58 1273.58,1498.58 1305,1530 1305,1690
  Int1 (GND) w6: v1(130.84,1583.84) 130.84,1629.16 v1(100,1660) 100,1795 v1(155,1850) 320.95,2015.95 345,2015.95 ; J1.SHELL@505.92,2015.95 345,2015.95 ; P1.6 670.47,80 1123.23,80 P4.6 ; v1(640,1395) 565,1470 385,1470 345,1510 345,2015.95 ; v1(680,1820) 553.35,1820 505,1868.35 v1(505,1870) 505,1988.72 521.34,2005.06 521.34,2034.61 521.34,2199.17 861.5,2199.17 861.5,2034.61 J1.SHELL@861.5,2012.95 ; v1(780,1615) 780,1931.46 J1.SHELL@861.5,2012.95 ; v1(880,1855) 861.5,1873.5 J1.SHELL@861.5,2012.95
  Bottom Layer w6: P1.6 P2.6 ; v1(670,1245) 670,1305 780,1415 v1(780,1615)
  other v1: 30,25 1340,30 110,140 710,140 1010,140 30,155 1340,160 1340,280 30,290 335,290 485,290 635,290 935,290 30,425 110,440 260,440 410,440 560,440 710,440 860,440 1010,440 30,560 635,590 935,590 1085,590 30,695 710,740 860,740 1010,740 1160,740 30,830 635,890 785,890 935,890 1235,890 710,1040 860,1040 1010,1040 1160,1040 1080,1090 378.71,1122.71 1235,1190 1050,1315 425,1320 940,1320 935,1410 450,1450 885,1470 1235,1490 1175,1525 800,1570 690,1615 885,1675 515,1685 1285,1715 760,1725 1095,1725 455,1730 135,1755 760,1780 880,1780 945,1800 40,1835 740,1845 950,1915 643.32,1926.41 711.84,1928.01 110,1940 260,1940 410,1940 1160,1940 475,1980 185,2090 335,2090 485,2090 935,2090 1085,2090 1235,2090
JTCK_0: P1.2 U1.6 | length 1934.4
  Top Layer w6: v1(430,1565) 441.3,1553.7 U1.6
  Bottom Layer w6: P1.2 60,375.51 60,1505 120,1565 v1(430,1565)
JTCK_1: P2.2 U1.17 | length 993.4
  Top Layer w6: v1(470,1380) 470.24,1380.24 535.47,1380.24 U1.17
  Bottom Layer w6: P2.2 271.89,1316.89 335,1380 v1(470,1380)
JTDI_0: P1.3 U1.7 | length 1912.3
  Top Layer w6: v1(445,1520) 462.95,1537.95 U1.7
  Bottom Layer w6: P1.3 85,429.25 85,1485 130,1530 434.64,1530 444.64,1520 v1(445,1520)
JTDI_1: P2.3 U1.18 | length 922.5
  Top Layer w6: v1(425,1350) 562.4,1350 563.27,1350.87 U1.18
  Bottom Layer w6: P2.3 350.63,1300.63 400,1350 v1(425,1350)
JTDO_0: P1.4 U1.11 | length 1840.1
  Top Layer w6: v1(470,1430) 470,1455 489.6,1474.6 535.35,1474.6 U1.11
  Bottom Layer w6: P1.4 110,482.99 110,1400 140,1430 v1(470,1430)
JTDO_1: P2.4 U1.19 | length 859.9
  Top Layer w6: v1(470,1315) 570,1315 579.02,1324.02 U1.19
  Bottom Layer w6: P2.4 429.37,1274.37 v1(470,1315)
JTMS_0: P1.5 U1.12 | length 1813.2
  Top Layer w6: v1(490,1410) 490,1445 504.21,1459.21 U1.12
  Bottom Layer w6: v1(490,1410) 185,1410 135,1360 135,536.73 P1.5
JTMS_1: P2.5 U1.20 | length 816.2
  Top Layer w6: v1(510,1285) 580,1285 594.76,1299.76 U1.20
  Bottom Layer w6: P2.5 509.06,614.57 509.06,1284.06 v1(510,1285)
NetC3_2: C3.2 R9.1 R10.2 U1.63 | length 692.4
  Top Layer w6: R10.2 245.79,1900 R9.1 C3.2 470,1900 510,1940 590,1940 605,1925 605,1885 570,1850 570,1790 642.01,1717.99 U1.63
NetC5_2: C5.2 U1.27 Y1.1 | length 311.3
  Top Layer w6: U1.27 705,1165 721.5,1148.5 Y1.1 760,1145.2 C5.2
NetC7_2: C7.2 U1.28 Y1.3 | length 314.6
  Top Layer w6: U1.28 720.75,1289.25 750,1260 833.03,1260 843.31,1249.72 Y1.3 910.08,1211.5 C7.2
NetC9_2: C9.2 U3.4 | length 60.9
  Top Layer w15: U3.4 1244.13,1819.33 1244.13,1760.87 C9.2
NetC11_2: C11.2 C12.2 FB3.2 U1.61 | length 518.8
  Top Layer w6: FB3.2 378.58,1760 C12.2 381.42,1760 v1(420,1760) ; v1(655,1760) 673.29,1741.71 673.29,1660.21 U1.61
  Bottom Layer w6: v1(420,1760) v1(655,1760)
NetD1_2: D1.2 R13.1 | length 83.9
  Top Layer w6: v1(1105,1355) D1.2
  Bottom Layer w6: v1(1105,1355) R13.1
NetD2_2: D2.2 R14.1 | length 85.9
  Top Layer w6: v1(1105,1280) 1145.38,1280 D2.2
  Bottom Layer w6: v1(1105,1280) R14.1
NetFB1_2: FB1.2 U1.57 | length 199
  Top Layer w6: U1.57 736.5,1811.5 745,1820 FB1.2
NetFB2_2: FB2.2 U1.30 | length 336.2
  Top Layer w6: U1.30 752.24,1309.73 777.97,1284 842.97,1284 866.97,1260 980,1260 990,1250 FB2.2
NetR1_2: R1.2 R5.1 U2.6 | length 153.1
  Top Layer w6: R5.1 330,1334 R1.2 U2.6
NetR6_2: R6.2 U1.60 | length 578
  Top Layer w6: R6.2 v1(380,1655) ; v1(680,1780) 680,1776.3 689.25,1767.04 U1.60
  Bottom Layer w6: v1(380,1655) 380,1770 390,1780 v1(680,1780)
NetR7_2: R7.2 U2.4 | length 155.8
  Top Layer w6: U2.4 380,925 390,915 440,915 449.61,905.39 R7.2
nPWREN: D2.1 U1.67 | length 1190.6
  Top Layer w6: v1(540,1705) 560,1705 579.02,1685.98 U1.67 ; D2.1 1210,1278.37 v1(1210,1230)
  Bottom Layer w6: v1(540,1705) 837.02,1705 860,1682.02 860,1530 913.84,1476.16 1038.84,1476.16 1075,1440 1075,1250 1095,1230 v1(1210,1230)
nRESET: C10.2 R12.1 SW1.1 U1.4 | length 1456.3
  Top Layer w6: U1.4 535.81,1585.1 563.98,1585.1 567.09,1588.21 583.21,1588.21 v1(585.82,1590.82) ; v1(625,935) 1078.58,935 C10.2 R12.1 1180.39,874.61 1202.68,852.32 SW1.1
  Bottom Layer w6: v1(585.82,1590.82) 600,1576.65 600,960 v1(625,935)
nSUSPEND: D1.1 U1.43 | length 463.6
  Top Layer w6: U1.43 843.15,1506.1 910.2,1506.1 921.3,1495 v1(925,1495) ; v1(1205,1420) 1205,1356.5 D1.1
  Bottom Layer w6: v1(925,1495) 1130,1495 v1(1205,1420)
UART_CTS_0: P3.5 U1.37 | length 943
  Top Layer w6: U1.37 843.15,1411.61 888.39,1411.61 v1(890,1410)
  Bottom Layer w6: v1(890,1410) 1128.11,1171.89 P3.5
UART_CTS_1: P4.5 U1.48 | length 2002.8
  Top Layer w6: U1.48 870.2,1585.2 880,1595 880,1601.65 903.35,1625 v1(925,1625)
  Bottom Layer w6: v1(925,1625) 1245,1625 1330,1540 1330,365.51 P4.5
UART_RTS_0: P3.4 U1.36 | length 886.3
  Top Layer w6: U1.36 873.78,1396.22 885,1385 v1(885,1335)
  Bottom Layer w6: v1(885,1335) 1049.37,1170.63 P3.4
UART_RTS_1: P4.4 U1.47 | length 1976.1
  Top Layer w6: U1.47 874.45,1569.45 v1(905,1600)
  Bottom Layer w6: v1(905,1600) 1235,1600 1305,1530 1305,419.25 P4.4
UART_RXD_0: P3.3 U1.35 | length 819.8
  Top Layer w6: U1.35 842.8,1317.2 v1(875,1285)
  Bottom Layer w6: v1(875,1285) 970.63,1189.37 P3.3
UART_RXD_1: P4.3 U1.46 | length 1953.3
  Top Layer w6: U1.46 878.23,1553.7 899.53,1575 v1(925,1575)
  Bottom Layer w6: v1(925,1575) 1225,1575 1280,1520 1280,472.99 P4.3
UART_TXD_0: P3.2 U1.34 | length 771.1
  Top Layer w6: v1(815.12,1302.84) 815.12,1352.8 U1.34
  Bottom Layer w6: v1(815.12,1302.84) 815.12,1299.88 891.89,1223.11 P3.2
UART_TXD_1: P4.2 U1.45 | length 1930.5
  Top Layer w6: U1.45 890.4,1537.95 902.45,1550 v1(905,1550)
  Bottom Layer w6: P4.2 1255,526.73 1255,1510 1215,1550 v1(905,1550)
USB_CC1: J1.A5 R11.2 U1.65 | length 676.2
  Top Layer w6: v1(535,1865) R11.2 535,1785 610.51,1709.49 U1.65 ; v1(740,2090) 740.31,2089.69 740.31,2010.31 J1.A5
  Bottom Layer w6: v1(535,1865) 535,1970 655,2090 v1(740,2090)
USB_CC2: J1.B5 R8.2 U1.62 | length 383.3
  Top Layer w6: J1.B5 622.52,1867.52 600,1845 R8.2 600,1785 657.76,1727.24 U1.62
USB_D_N: J1.A7 J1.B7 U1.58 U6.2 | length 490
  Top Layer w6: v1(682.42,2050) 682,2049.58 682,2010.42 J1.A7 681.57,1926.54 713.11,1895 U6.2 ; v1(720.1,2050) 720.52,2049.58 720.52,2010.42 J1.B7 J1.B7@720.47,2009.53 ; U6.2@720.47,1895.47 U6.2 ; U1.58 720.39,1660.36 720.39,1894.61 U6.2
  Bottom Layer w6: v1(682.42,2050) v1(720.1,2050)
USB_D_P: J1.A6 J1.B6 U1.59 U5.2 | length 532.8
  Top Layer w6: J1.A6 701.26,2068.74 695,2075 670,2075 661.89,2066.89 J1.B6 663.44,2008.44 663.44,1896.56 U5.2 671.89,1895 705,1861.89 U1.59
VBUS_USB: C8.2 J1.A4 J1.A9 J1.B4 J1.B9 P1.1 P2.1 P3.1 P4.1 R9.2 U3.1 U3.3 U4.2 | length 5078.9
  Top Layer w6: v1(315,1805) 312.49,1807.51 312.49,1812.49 315,1815 R9.2 ; U3.3 1170.2,1820.2 1180,1830 1180,1885 1170,1895 U3.1
  Top Layer w15: J1.A9 J1.B4 602.95,2010.11 602.95,2107.95 620,2125 760,2125 779.89,2105.11 779.89,2010.11 J1.B9 780,1965 800,1945 965,1945 984.33,1925.67 U4.2 C8.2 ; v1(1070,1927.5) C8.2 ; U3.1 C8.2
  Top Layer w30: P2.1 P1.1 193.15,106.85 225,75 775,75 810.46,110.46 810.46,160.93 P4.1 P3.1
  Int2 (PWR) w30: P2.1 193.15,746.85 40,900 40,1775 70,1805 v1(315,1805) 395,1805 550,1960 1037.5,1960 v1(1070,1927.5)
  other v1: 1035,1960
pads on no net: J1.5 J1.6 J1.A8 J1.B8 U1.5 U1.13 U1.14 U1.15 U1.16 U1.21 U1.22 U1.23 U1.24 U1.32 U1.33 U1.38 U1.40 U1.41 U1.42 U1.49 U1.50 U1.52 U1.53 U1.54 U1.55 U1.56 U1.69 U2.7
copper on no net:
  other v1: 624.29,1441.5 667.6,1441.5 710.91,1441.5 754.21,1441.5 624.29,1484.8 667.6,1484.8 710.91,1484.8 754.21,1484.8 624.29,1528.11 667.6,1528.11 710.91,1528.11 754.21,1528.11 624.29,1571.42 667.6,1571.42 710.91,1571.42 754.21,1571.42

## Polygon pours and split planes (outlines as drawn)
GND on Int1 (GND) "GND_L02_P001" (solid, remove dead copper, pour order 1): 0,0 0,2285 1370,2285 1370,0
GND on Top Layer "GND_L01_P000" (solid, remove dead copper, pour order 0): 0,0 0,2285 1370,2285 1370,0
GND on Int2 (PWR) "GND_L03_P002" (solid, remove dead copper, pour order 2): 0,0 0,2285 1370,2285 1370,0
GND on Bottom Layer "GND_L04_P003" (solid, remove dead copper, pour order 3): 0,0 0,2285 1370,2285 1370,0

## Keep-outs
Keep-Out Layer:
  the board outline again, w10

## Other copper
Top Layer:
  region: 237.98,6502.29 237.67,6501.05 237.2,6500.58 236.27,6500.89 235.81,6502.29 236.12,6505.7 237.2,6507.1 237.67,6506.95 237.98,6505.7 238.14,6502.44

## Silkscreen, mask and mechanical layers (free items; w line width, h text height)
Top Overlay:
  lines w10: 430,1660 285,1660 265,1640 265,1400 285,1380 415,1380 430,1395 430,2170 390,2210 175,2210 ; 175,2210 175,1975 40,1975 40,2210 175,2210
  text "JTAG 1" at 223,702 h40
  text "UART 0" at 848,702 h40
  text "VCC" at 173,467 h40 r270
  text "JTCK" at 252,467 h40 r270
  text "JTDI" at 331,467 h40 r270
  text "JTDO" at 410,467 h40 r270
  text "JTMS" at 489,467 h40 r270
  text "GND" at 568,467 h40 r270
  text "VCC" at 793,467 h40 r270
  text "TXD" at 872,467 h40 r270